# Altium PCB pcb_full_revD.PcbDoc (part 1 of 2)
Units mm, origin at the board's own origin, x right, y up, seen from the top; angles counter-clockwise.
Board outline 49.62 x 32.2 mm, 2 copper layers (Top Layer, Bottom Layer); 45 components, 51 nets, 180 pads, 111 vias.
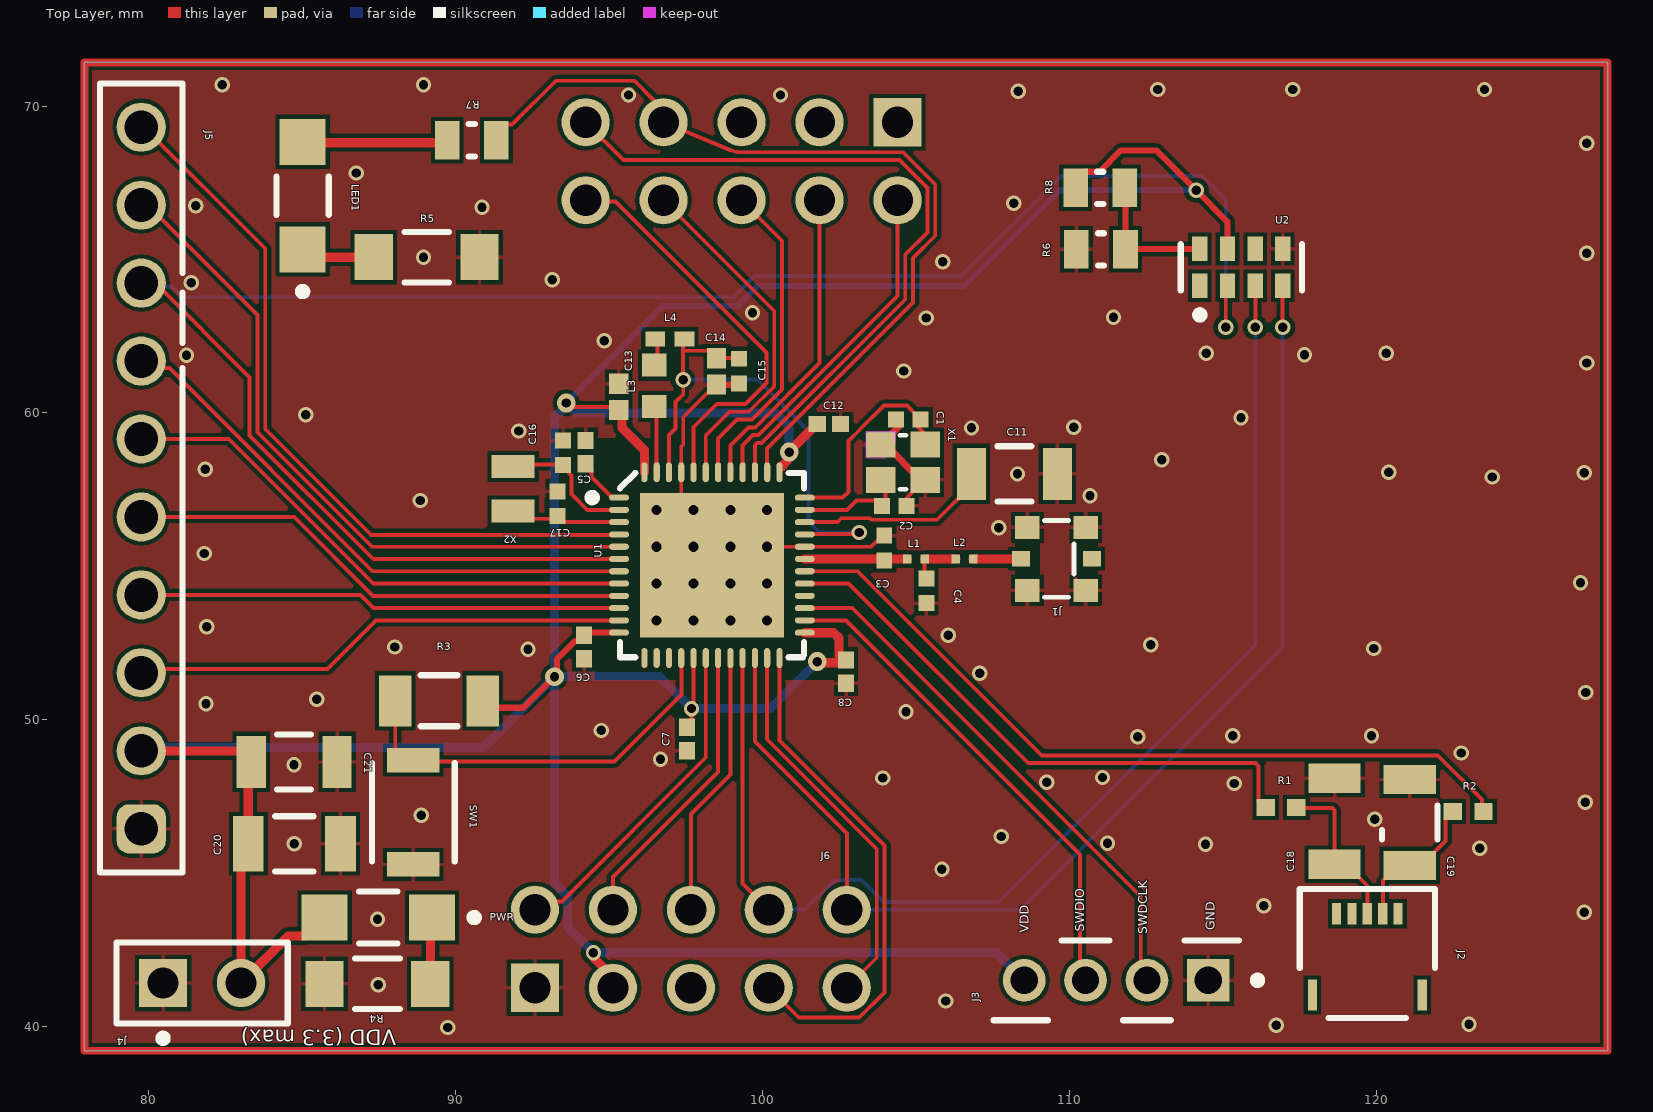
[diagram p0: Top Layer view]
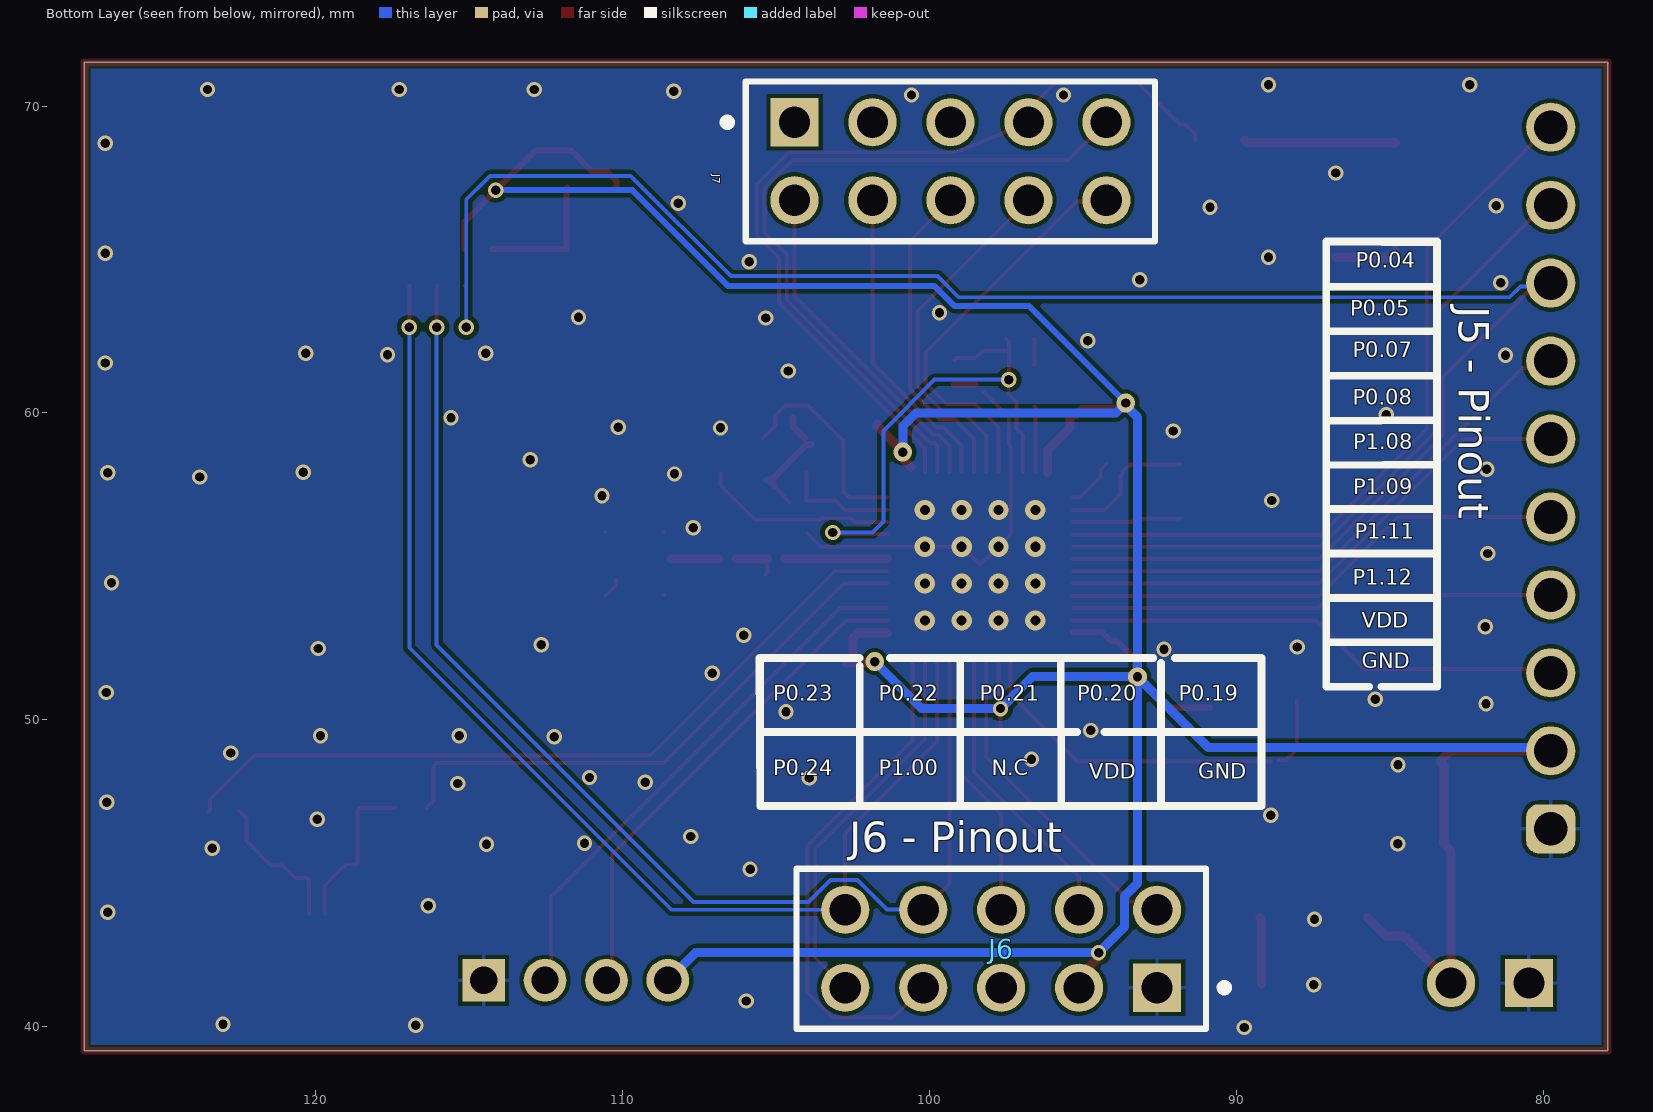
[diagram p1: Bottom Layer view, seen from below]
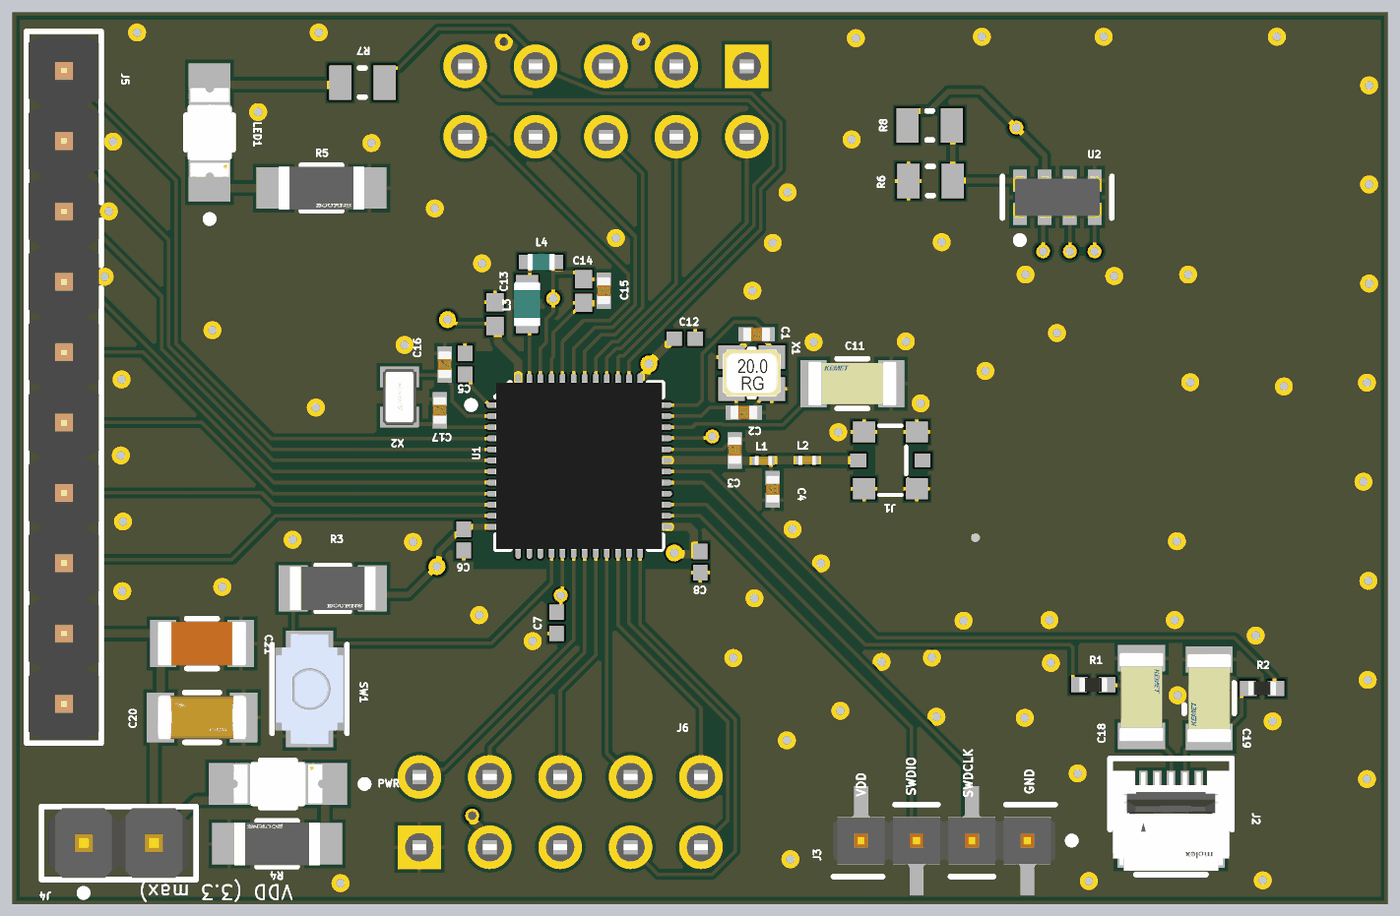
[diagram p2: 3D render of the assembled board from above, using the file's embedded part models]

## Layer stack, top to bottom
Top Solder: solder mask 0.0102, Solder Resist, Dk 3.5
Top Layer: signal copper 0.0356
Dielectric 1: dielectric 0.32, FR-4, Dk 4.8
Bottom Layer: signal copper 0.0356
Bottom Solder: solder mask 0.0102, Solder Resist, Dk 3.5

## Board outline
77.906,39.221 77.906,71.42 127.528,71.42 127.528,39.221

## Design rules (kind name [scope] priority, off if disabled: settings)
BoardOutlineClearance [All] p1: gap=0.2 ignorepadtopadclearanceinfootprint=FALSE
Clearance [All] p1: gap=0.127 ignorepadtopadclearanceinfootprint=FALSE except(0.25: Arc-Hole Track-Hole SMDPad-Hole THPad-Hole Via-Hole Fill-Hole Poly-Hole Region-Hole Text-Hole)
ComponentClearance [All] p1: gap=0.127 collisioncheckmode=3 verticalgap=0.127 showdistances=TRUE
DiffPairsRouting [All] p1: maxlimit=0.254 minlimit=0.127 mostfreqgap=0.127 toplayer_minwidth=0.127 toplayer_maxwidth=25.4 toplayer_prefwidth=0.127 bottomlayer_minwidth=0.127 bottomlayer_maxwidth=25.4 bottomlayer_prefwidth=0.127 maxuncoupledlength=12.7
Height [All] p1: minheight=0 maxheight=1816.048 prefheight=12.7
HoleSize [All] p1: absolutevalues=TRUE maxlimit=6.3 minlimit=0.3 maxpercent=80.000 minpercent=20.000
HoleToHoleClearance [All] p1: gap=0.25 allowstackedmicrovias=FALSE
MinimumAnnularRing [All] p1: minimumring=0.076
MinimumSolderMaskSliver [All] p1: minsoldermaskwidth=0.05
PlaneClearance [All] p1: clearance=0.127
PlaneConnect PlaneConnectPowerPads [InPadClass('PowerPads')] p1: planeconnectstyle=Direct reliefexpansion=0.508 reliefentries=4 reliefconductorwidth=0.254 reliefairgap=0.254
PlaneConnect [All] p2: pad.planeconnectstyle=Relief pad.reliefexpansion=0.3 pad.reliefentries=4 pad.reliefconductorwidth=0.127 pad.reliefairgap=0.127 via.planeconnectstyle=Direct via.reliefexpansion=0.3 via.reliefentries=4 via.reliefconductorwidth=0.127 via.reliefairgap=0.127
PolygonConnect PolygonConnectPowerPads [All vs (InPadClass('PowerPads'))] p1: connectstyle=Direct reliefconductorwidth=0.254 reliefentries=4 polygonreliefangle="90 Angle" airgapwidth=0.254
PolygonConnect [All] p2: thpad.connectstyle=Relief thpad.reliefconductorwidth=0.127 thpad.reliefentries=4 thpad.polygonreliefangle="90 Angle" thpad.airgapwidth=0.127 smdpad.connectstyle=Relief smdpad.reliefconductorwidth=0.127 smdpad.reliefentries=4 smdpad.polygonreliefangle="90 Angle" smdpad.airgapwidth=0.127 via.connectstyle=Direct via.reliefconductorwidth=0.127 via.reliefentries=4 via.polygonreliefangle="90 Angle" via.airgapwidth=0.127
RoutingVias [All] p1: holewidth=0.3 width=0.6 viastyle="Through Hole" minholewidth=0.3 minwidth=0.5 maxholewidth=0.6 maxwidth=6.6
SilkToSilkClearance [All] p1: silktosilkclearance=0
SilkToSolderMaskClearance [IsPad] p1: minsilkscreentomaskgap=0 clearancetoexposedcopper=TRUE
SolderMaskExpansion [All] p1: expansion=0.075 istentingtop=FALSE
Width [All] p1: maxlimit=25.4 minlimit=0.127 preferedwidth=0.127 minimp=50.000000 maximp=50.000000 favimp=50.000000
20 further rules are at their usual default settings.

## Components (designator, comment, footprint, x,y, rotation, side; value= is the part's Value field where it differs from the comment)
C1 "12pF" FP-C0402-BB-MFG 104.75,59.792 r180 top value="12 pF"
C2 "12pF" FP-C0402-BB-MFG 104.292,56.972 r180 top value="12 pF"
C3 "1pF" FP-C0402-BB-MFG 103.962,55.601 r90 top value="1.0 pF"
C4 "1.2pF" FP-C0402-BB-MFG 105.334,54.204 r270 top value="1.2 pF"
C5 "100nF" CAPC1005X55X30LL05T10 94.234,58.725 r270 top
C6 "100nF" CAPC1005X55X30LL05T10 94.183,52.375 r90 top
C7 "100nF" CAPC1005X55X30LL05T10 97.536,49.378 r90 top
C8 "100nF" CAPC1005X55X30LL05T10 102.72,51.575 r90 top
C11 "100pF" FP-C1206C-EB-MFG 108.204,58.014 r0 top value="100 pF"
C12 "100nF" CAPC1005X55X30LL05T10 102.159,59.639 r180 top
C13 "1uF" CAPC1005X60X30NL05T10 95.313,60.525 r270 top
C14 "1uF" CAPC1005X60X30NL05T10 98.505,61.355 r90 top
C15 "47nF" FP-C0402-BB-MFG 99.238,61.366 r270 top value="47,000 pF"
C16 "12pF" FP-C0402-BB-MFG 93.497,58.699 r90 top value="12 pF"
C17 "12pF" FP-C0402-BB-MFG 93.32,57.048 r90 top value="12 pF"
C18 "300pF" FP-C1206C-EB-MFG 118.634,46.698 r270 top value="300 pF"
C19 "300pF" FP-C1206C-EB-MFG 121.082,46.66 r90 top value="300 pF"
C20 "CC1206KRX7R9BB104" FP-CC1206-1_25-MFG 84.745,45.962 r0 top value="100 nF"
C21 "C1206C106K4RACAUTO" FP-C1206C-EH-MFG 84.739,48.629 r0 top value=10uF
J1 "MM8130-2600" COAXIAL-SWF 109.576,55.245 r90 top
J2 "503480-0540" FP-503480-0540-MFG 119.701,42.388 r0 top
J3 "TMM-104-01-S-S" FP-TMM-104-01-S-S-MFG 111.521,41.516 r180 top
J4 "M20-9990245" FP-M20-9990245-MFG 81.737,41.427 r0 top
J5 "61301011121" 61301011121 79.756,57.881 r90 top
J6 "Comment" FP-10-89-7101-MFG 97.663,42.545 r0 bottom
J7 "Comment" FP-10-89-7101-MFG 99.314,68.199 r180 bottom
L1 "4.7nH" INDC0603X03L_C 104.994,55.238 r0 top
L2 "2.2nH" INDC0603X03L_C 106.578,55.245 r0 top
L3 "10µH" INDC1608X06L 96.469,60.884 r270 top
L4 "15nH" INDC1005X04L 96.977,62.408 r180 top
LED1 "HSMS-C150" FP-HSMS-C150-MFG 85.014,67.081 r90 top
PWR "HSMS-C150" FP-HSMS-C150-MFG 87.48,43.561 r180 top
R1 "0R" RESC1005X04L 116.892,47.142 r180 top
R2 "0R" RESC1005X04L 122.987,47.015 r0 top
R3 "10k" FP-CR1206-IPC_B 89.459,50.622 r0 top
R4 "CR1206-JW-221ELF" FP-CR1206-MFG 87.452,41.402 r180 top
R5 "CR1206-JW-221ELF" FP-CR1206-MFG 89.052,65.075 r0 top
R6 "0R" RESC2013X60X35LL10T20 110.998,67.335 r180 top
R7 "0R" RESC2013X60X35LL10T20 90.526,68.885 r180 top
R8 "0R" RESC2013X60X35LL10T20 111.023,65.329 r0 top
SW1 "" FP-B3U-1000P-MFG 88.621,46.99 r90 top
U1 "nRF52840-QFAA" QFN40P600X600X90-48N 98.349,55.042 r0 top
U2 "RV-3028-C7 32.768kHz 1ppm TA QC" FP-RV-3028-C7_32_768kHz_1-MFG 115.595,64.745 r0 top
X1 "32MHz" XTAL_2016_NT 104.572,58.395 r0 top
X2 "32.768KHZ" FP-ABS06-MFG 91.872,57.531 r90 top

## Footprints (in the part's own frame and the unit in brackets; to place one, negate y for a bottom-side part, rotate by r counter-clockwise, add the part's x,y. Pads: shape width x height; smd on the part's side, far side on the other; paste and mask are expansions set on the pad)
61301011121 [mm] "Pin Header, pitch 2.54 mm, THT, Vertical, single row, 10p"
  rrect50% 1.6x1.6 hole 1.1: 1(-11.43,0)
  round 1.6 hole 1.1: 2(-8.89,0) 3(-6.35,0) 4(-3.81,0) 5(-1.27,0) 6(1.27,0) 7(3.81,0) 8(6.35,0) 9(8.89,0) 10(11.43,0)
  silkscreen extent -12.85,-1.35 12.85,1.35, body extent -12.7,-1.27 12.7,1.27, height 8.57
CAPC1005X55X30LL05T10 [mm] "Chip Capacitor, 2-Leads, Body 1.00x0.50mm, IPC High Density"
  rect 0.56x0.52 smd: 1(-0.38,0) 2(0.38,0)
  body extent -0.53,-0.28 0.53,0.28, height 0.55
CAPC1005X60X30NL05T10 [mm] "Chip Capacitor, 2-Leads, Body 1.00x0.50mm, IPC Medium Density"
  rect 0.66x0.62 smd: 1(-0.43,0) 2(0.43,0)
  body extent -0.53,-0.28 0.53,0.27, height 0.6
COAXIAL-SWF [mm]
  rect 0.5x0.58 smd: 1(0,1.16) 3(0,-1.16)
  rect 0.75x0.8 smd: 2(-1.025,-0.95) 2(-1.025,0.95) 2(1.025,-0.95) 2(1.025,0.95)
  Top Layer pour cut-out: -0.65,0.55 0.65,0.55 0.65,1.35 -0.65,1.35
  Top Layer pour cut-out: 0.65,-0.55 -0.65,-0.55 -0.65,-1.35 0.65,-1.35
  silkscreen extent -1.25,-0.57 1.25,0.4, body extent -1.26,-1.3 1.26,1.3, height 1.55
FP-10-89-7101-MFG [mm]
  rect 1.57x1.57 hole 1.02 paste-2539.97 mask+0: 1(-5.08,1.27)
  round 1.57 hole 1.02 paste-2539.97 mask+0: 2(-5.08,-1.27) 3(-2.54,1.27) 4(-2.54,-1.27) 5(0,1.27) 6(0,-1.27) 7(2.54,1.27) 8(2.54,-1.27) 9(5.08,1.27) 10(5.08,-1.27)
  silkscreen extent -7.39,-2.61 6.67,2.61, body extent -6.35,-2.54 6.35,2.54, height 8.89
FP-503480-0540-MFG [mm]
  rect 0.3x0.7 smd paste+0 mask+0: 1(-1,1.3) 2(-0.5,1.3) 3(0,1.3) 4(0.5,1.3) 5(1,1.3)
  rect 0.3x1 smd paste+0 mask+0: 6(-1.79,-1.35) 7(1.79,-1.35)
  silkscreen extent -2.2,-2.1 2.2,2.1, body extent -2.3,-2.2 2.3,2.2, height 0.25
FP-ABS06-MFG [mm]
  rect 0.75x1.4 smd paste+0 mask+0: 1(-0.725,0) 2(0.725,0)
  body extent -1.2,-0.8 1.2,0.8, height 0.25
FP-B3U-1000P-MFG [mm]
  rect 0.8x1.7 smd paste+0 mask+0: 1(-1.7,0) 2(1.7,0)
  silkscreen extent -1.6,-1.35 1.6,1.35, body extent -2.2,-1.45 2.2,1.45, height 0.25
FP-C0402-BB-MFG [mm]
  rect 0.52x0.52 smd paste+0 mask+0: 1(-0.4,0) 2(0.4,0)
  body extent -0.8,-0.4 0.8,0.4, height 0.25
FP-C1206C-EB-MFG [mm]
  rect 0.95x1.7 smd paste+0 mask+0: 1(-1.4,0) 2(1.4,0)
  silkscreen extent -0.55,-0.9 0.55,0.9, body extent -2,-1 2,1, height 0.25
FP-C1206C-EH-MFG [mm]
  rect 0.95x1.7 smd paste+0 mask+0: 1(-1.4,0) 2(1.4,0)
  silkscreen extent -0.55,-0.9 0.55,0.9, body extent -2,-1 2,1, height 0.25
FP-CC1206-1_25-MFG [mm]
  rect 1x1.8 smd paste+0 mask+0: 1(-1.5,0) 2(1.5,0)
  silkscreen extent -0.63,-0.9 0.63,0.9, body extent -2.2,-1.25 2.2,1.25, height 0.25
FP-CR1206-IPC_B [mm]
  rect 1.058x1.662 smd paste+0 mask+0: 1(-1.427,0) 2(1.427,0)
  silkscreen extent -0.6,-0.83 0.6,0.83, body extent -2.21,-1.08 2.21,1.08, height 0.25
FP-CR1206-MFG [mm]
  rect 1.25x1.5 smd paste+0 mask+0: 1(-1.725,0) 2(1.725,0)
  silkscreen extent -0.72,-0.82 0.72,0.82, body extent -2.45,-0.92 2.45,0.92, height 0.25
FP-HSMS-C150-MFG [mm]
  rect 1.5x1.5 smd paste+0 mask+0: 1(-1.75,0) 2(1.75,0)
  silkscreen extent -3.25,-0.85 0.63,0.85, body extent -2.6,-0.95 2.6,0.95, height 0.25
FP-M20-9990245-MFG [mm]
  rect 1.57x1.57 hole 1.02 paste-2539.97 mask+0: 1(-1.27,0)
  round 1.57 hole 1.02 paste-2539.97 mask+0: 2(1.27,0)
  silkscreen extent -2.79,-1.92 2.79,1.32, body extent -2.89,-1.42 2.89,1.42, height 0.25
FP-RV-3028-C7_32_768kHz_1-MFG [mm]
  rect 0.5x0.8 smd paste+0 mask+0: 1(-1.35,-0.6) 2(-0.45,-0.6) 3(0.45,-0.6) 4(1.35,-0.6) 5(1.35,0.6) 6(0.45,0.6) 7(-0.45,0.6) 8(-1.35,0.6)
  silkscreen extent -1.97,-1.67 1.97,0.75, body extent -1.7,-1.1 1.7,1.1, height 0.25
FP-TMM-104-01-S-S-MFG [mm]
  rect 1.39x1.39 hole 0.89 paste-2539.97 mask+0: 1(-3,0)
  round 1.39 hole 0.89 paste-2539.97 mask+0: 2(-1,0) 3(1,0) 4(3,0)
  silkscreen extent -4.73,-1.3 4,1.3, body extent -4.1,-2.07 4.1,2.07, height 0.25
INDC0603X03L_C [mm]
  rect 0.27x0.3 smd: 1(-0.285,0) 2(0.285,0)
  body extent -0.31,-0.16 0.31,0.16, height 0.26
INDC1005X04L [mm]
  rect 0.65x0.5 smd: 1(-0.475,0) 2(0.475,0)
  body extent -0.5,-0.3 0.5,0.3, height 0.5
INDC1608X06L [mm]
  rect 0.75x0.8 smd: 1(-0.675,0) 2(0.675,0)
  body extent -0.8,-0.48 0.8,0.48, height 0.8
QFN40P600X600X90-48N [mm]
  oval 0.65x0.2 smd: 1(-3.025,2.2) 2(-3.025,1.8) 3(-3.025,1.4) 4(-3.025,1) 5(-3.025,0.6) 6(-3.025,0.2) 7(-3.025,-0.2) 8(-3.025,-0.6) 9(-3.025,-1) 10(-3.025,-1.4) 11(-3.025,-1.8) 12(-3.025,-2.2) 25(3.025,-2.2) 26(3.025,-1.8) 27(3.025,-1.4) 28(3.025,-1) 29(3.025,-0.6) 30(3.025,-0.2) 31(3.025,0.2) 32(3.025,0.6) 33(3.025,1) 34(3.025,1.4) 35(3.025,1.8) 36(3.025,2.2)
  oval 0.2x0.65 smd: 13(-2.2,-3.025) 14(-1.8,-3.025) 15(-1.4,-3.025) 16(-1,-3.025) 17(-0.6,-3.025) 18(-0.2,-3.025) 19(0.2,-3.025) 20(0.6,-3.025) 21(1,-3.025) 22(1.4,-3.025) 23(1.8,-3.025) 24(2.2,-3.025) 37(2.2,3.025) 38(1.8,3.025) 39(1.4,3.025) 40(1,3.025) 41(0.6,3.025) 42(0.2,3.025) 43(-0.2,3.025) 44(-0.6,3.025) 45(-1,3.025) 46(-1.4,3.025) 47(-1.8,3.025) 48(-2.2,3.025)
  rect 4.7x4.7 smd: 49(0,0)
  silkscreen extent -4.02,-3 3,3, body extent -3.02,-3.02 3.02,3.02, height 0.86
RESC1005X04L [mm]
  rect 0.6x0.55 smd: 1(-0.5,0) 2(0.5,0)
  body extent -0.5,-0.25 0.5,0.25, height 0.3
RESC2013X60X35LL10T20 [mm] "Chip Resistor, 2-Leads, Body 2.00x1.25mm, IPC High Density"
  rect 0.8x1.25 smd: 1(-0.8,0) 2(0.8,0)
  silkscreen extent -0.1,-0.53 0.1,0.53, body extent -1.05,-0.67 1.05,0.67, height 0.6
XTAL_2016_NT [mm]
  rect 0.95x0.85 smd: 1(-0.725,-0.575) 2(-0.725,0.575) 2(0.725,-0.575) 3(0.725,0.575)
  Top Layer lines w0.225: -0.725,0.575 -0.675,0.575 -0.575,0.575 0.575,-0.575 0.629,-0.575 0.675,-0.575 0.725,-0.575
  Top Layer keep-out lines w0.01: -0.55,0.15 -1.2,0.15 -1.2,1 -0.25,1 -0.25,0.65
  silkscreen extent -0.1,-0.88 0.1,0.88, body extent -1.05,-0.85 1.05,0.85, height 0.56

## Part data
C1 C2 C16 C17: library part CMP-1034-00766-3, "CAP CER 12PF 50V NP0 0402", Capacitance="12 pF", Manufacturer=Kemet, Manufacturer Part Number=C0402C120D5GACTU, Package=C0402-BB, Temperature="-55°C to +125°C", Temperature Characteristic=C0G, Temperature Coefficient=15%, Temperature Range High=+125°C, Temperature Range Low=-55°C, Tolerance="0.5 pF", Voltage Rating="50 V", Automotive=No, Category=Cap, ComponentLink2Description=Datasheet, ComponentLink2URL=https://content.kemet.com/datasheets/KEM_C1002_X7R_SMD.pdf, Device Class L1="Passive Components", Device Class L2=Capacitors, Device Class L3="Ceramic Capacitors", Digikey Description="CAP CER 12PF 50V NP0 0402", Height=0.55mm, Ipc Land Pattern Name=CAPC10050X50, Lead Free=Yes, Material=Ceramic, Mouser Description="Multilayer Ceramic Capacitors MLCC - SMD/SMT 50volts 12pF C0G Tol=0.5pF", Octopart=https://octopart.com/c0402c120d5gactu-kemet-15963451, RoHS=TRUE
C3: library part CMP-2008-03470-3, "CAP CER 1PF 50V NP0 0402", Capacitance="1.0 pF", Manufacturer=Kemet, Manufacturer Part Number=C0402C109C5GACTU, Package=C0402-BB, Temperature="-55°C to +125°C", Temperature Characteristic=C0G, Temperature Coefficient=15%, Temperature Range High=+125°C, Temperature Range Low=-55°C, Tolerance="0.25 pF", Voltage Rating="50 V", Automotive=No, Category=Cap, ComponentLink2Description=Datasheet, ComponentLink2URL=https://content.kemet.com/datasheets/KEM_C1002_X7R_SMD.pdf, Device Class L1="Passive Components", Device Class L2=Capacitors, Device Class L3="Ceramic Capacitors", Digikey Description="CAP CER 1PF 50V NP0 0402", Height=0.55mm, Ipc Land Pattern Name=CAPC10050X50, Lead Free=Yes, Material=Ceramic, Mouser Description="Multilayer Ceramic Capacitors MLCC - SMD/SMT 50volts 1.0pF C0G .25pF", Octopart=https://octopart.com/c0402c109c5gactu-kemet-9138550, RoHS=TRUE
C4: library part CMP-2008-03099-3, "CAP CER 1.2PF 50V C0G/NP0 0402", Capacitance="1.2 pF", Manufacturer=Kemet, Manufacturer Part Number=C0402C129C5GACTU, Package=C0402-BB, Temperature="-55°C to +125°C", Temperature Characteristic=C0G, Temperature Coefficient=15%, Temperature Range High=+125°C, Temperature Range Low=-55°C, Tolerance="0.25 pF", Voltage Rating="50 V", Automotive=No, Category=Cap, ComponentLink2Description=Datasheet, ComponentLink2URL=https://content.kemet.com/datasheets/KEM_C1002_X7R_SMD.pdf, Device Class L1="Passive Components", Device Class L2=Capacitors, Device Class L3="Ceramic Capacitors", Digikey Description="CAP CER 1.2PF 50V C0G/NP0 0402", Height=0.55mm, Ipc Land Pattern Name=CAPC10050X50, Lead Free=Yes, Material=Ceramic, Mouser Description="Cap Ceramic 1.2pF 50V C0G 0.25pF SMD 0402 125°C Paper T/R", Octopart=https://octopart.com/c0402c129c5gactu-kemet-193076, RoHS=TRUE
C5 C6 C7 C8 C12: library part CMP-0001-00074-2, Manufacturer=Kemet, Part Number=C0402C104K4RACTU
C11: library part CMP-03020-032313-1, "CAP CER 100PF 50V 10% NP0 1206", Capacitance="100 pF", Manufacturer=KEMET, Manufacturer Part Number=C1206C101K5GACTU, Package=C1206C-EB, Temperature="-55°C to +150°C", Temperature Characteristic=C0G, Temperature Coefficient=15%, Temperature Range High=+150°C, Temperature Range Low=-55°C, Tolerance=0.1, Voltage Rating="50 V", Automotive=Yes, Automotive Grade="Grade 0", Category=Cap, ComponentLink2Description=Datasheet, ComponentLink2URL=https://content.kemet.com/datasheets/KEM_C1007_X8R_ULTRA_150C_SMD.pdf, Device Class L1="Passive Components", Device Class L2=Capacitors, Device Class L3="Ceramic Capacitors", Digikey Description="CAP CER 100PF 50V 10% NP0 1206", Height=0.88mm, Ipc Land Pattern Name=CAPC320160X78, Lead Free=Yes, Material=Ceramic, Mouser Description="Multilayer Ceramic Capacitors MLCC - SMD/SMT 50volts 100pF C0G 10%", Octopart=https://octopart.com/c1206c101k5gactu-kemet-9138650, RoHS=TRUE
C13 C14: library part CMP-2008-02056-1, Manufacturer=Kemet, Part Number=C0402C105M8PACTU
C15: library part CMP-2008-03220-2, "CAP CER 0.047UF 25V 10% X7R 0402", Capacitance="47,000 pF", Manufacturer=Kemet, Manufacturer Part Number=C0402C473K3RACTU, Package=C0402-BB, Temperature="-55°C to +125°C", Temperature Characteristic=X7R, Temperature Coefficient=15%, Temperature Range High=+125°C, Temperature Range Low=-55°C, Tolerance=0.1, Voltage Rating="25 V", Automotive=No, Category=Cap, ComponentLink2Description=Datasheet, ComponentLink2URL=https://content.kemet.com/datasheets/KEM_C1002_X7R_SMD.pdf, Device Class L1="Passive Components", Device Class L2=Capacitors, Device Class L3="Ceramic Capacitors", Digikey Description="CAP CER 0.047UF 25V 10% X7R 0402", Height=0.55mm, Ipc Land Pattern Name=CAPC10050X50, Lead Free=Yes, Material=Ceramic, Mouser Description="Multilayer Ceramic Capacitors MLCC - SMD/SMT 25volts 47000pF X7R 10%", Octopart=https://octopart.com/c0402c473k3ractu-kemet-108381, RoHS=TRUE
C18 C19: library part CMP-1037-01976-2, "CAP CER 300PF 50V 5% NP0 1206", Capacitance="300 pF", Manufacturer=KEMET, Manufacturer Part Number=C1206C301J5GACTU, Package=C1206C-EB, Temperature="-55°C to +150°C", Temperature Characteristic=C0G, Temperature Coefficient=15%, Temperature Range High=+150°C, Temperature Range Low=-55°C, Tolerance=0.05, Voltage Rating="50 V", Automotive=Yes, Automotive Grade="Grade 0", Category=Cap, ComponentLink2Description=Datasheet, ComponentLink2URL=https://content.kemet.com/datasheets/KEM_C1007_X8R_ULTRA_150C_SMD.pdf, Device Class L1="Passive Components", Device Class L2=Capacitors, Device Class L3="Ceramic Capacitors", Digikey Description="CAP CER 300PF 50V 5% NP0 1206", Height=0.88mm, Ipc Land Pattern Name=CAPC320160X78, Lead Free=Yes, Material=Ceramic, Mouser Description="Cap Ceramic 300pF 50V C0G 5% SMD 1206 125°C Plastic T/R", Octopart=https://octopart.com/c1206c301j5gactu-kemet-12563790, RoHS=TRUE
C20: library part CMP-03422-000842-1, "CAP CER 0.1UF 50V X7R 1206", Capacitance="100 nF", Manufacturer=Yageo, Package=CC1206-1.25, Temperature="-55°C to +125°C", Temperature Characteristic=X7R, Temperature Coefficient=15%, Temperature Range High=+125°C, Temperature Range Low=-55°C, Tolerance=0.1, Voltage Rating="50 V", Automotive=No, Automotive Grade=NA, Category=Cap, ComponentLink2Description=Datasheet, ComponentLink2URL=http://www.yageo.com/documents/recent/UPY-NP0X7R_HV_1KV-to-3KV_11.pdf, Device Class L1="Passive Components", Device Class L2=Capacitors, Device Class L3="Ceramic Capacitors", Digikey Description="CAP CER 0.1UF 50V X7R 1206", Footprint Url=http://www.yageo.com/exep/pages/download/literatures/UPY-C_GEN_24.pdf, Height=1.45mm, Lead Free=Yes, Manufacturer Part Number=CC1206KRX7R9BB104, Material=Ceramic, Mouser Description="Multilayer Ceramic Capacitors MLCC - SMD/SMT 100nF 50V X7R 10%", Octopart=https://octopart.com/cc1206krx7r9bb104-yageo-39467816, RoHS=TRUE
C21: library part CMP-03020-003375-1, "CAP CER 10UF 16V X7R 1206", Capacitance=10uF, Manufacturer=Kemet, Package=C1206C-EH, Temperature="-55°C to +125°C", Temperature Characteristic=X7R, Temperature Coefficient=15%, Temperature Range High=+125°C, Temperature Range Low=-55°C, Tolerance=10%, Voltage Rating=16V, Automotive=Yes, Automotive Grade="Grade 1", Category=Cap, ComponentLink2Description=Datasheet, ComponentLink2URL=https://content.kemet.com/datasheets/KEM_C1023_X7R_AUTO_SMD.pdf, Device Class L1="Passive Components", Device Class L2=Capacitors, Device Class L3="Ceramic Capacitors", Digikey Description="CAP CER 10UF 16V X7R 1206", Height=1.8mm, Ipc Land Pattern Name=CAPC320160X160, Lead Free=Yes, Manufacturer Part Number=C1206C106K4RACAUTO, Material=Ceramic, Mouser Description="Multilayer Ceramic Capacitors MLCC - SMD/SMT 10uF 16V 10% AUTO", Octopart=https://octopart.com/c1206c106k4racauto-kemet-20072893, RoHS=TRUE
J1: "Coaxial Connector with Switch", Manufacturer=Murata, Part number IPS=00000009955, Part number Norautron=N.A., Supplier Part Number 1=490-4981-1-ND, Artikkelnr Noca=55029011, Author=rsk, Component Class=Connectors, ComponentLink1Description=Datasheet, ComponentLink1URL=N.A., ComponentLink2Description="Supplier link", ComponentLink2URL=N.A., Footprint Doc=COAXIAL-SWF, HelpURL=http://www.murata.com/products/catalog/pdf/o33e.pdf, LatestRevisionDate=2014-04-24, Manufacturer Part Number=MM8130-2600, Note=N.A., Pad Count=3, Part Number=MM8130-2600, PartId=100500400, Pin Count=3, Published=2014-04-24, Publisher="Nordic Semiconductor", Supplier 1=Digi-Key, Supplier 2=Mouser, Supplier Part Number 2=81-MM8130-2600RA2
J2: library part CMP-00257-52963780-1, "503480-0540 Connector FFC/FPC SKT 5 Position 0.5mm Solder Right Angle Surface Mount T/R", Current Rating=500mA, Flammability Rating="UL94 V-0", Manufacturer Lifecycle Status=ACTIVE, Max Operating Temperature=85°C, Min Operating Temperature=-40°C, Voltage Rating=50V, Actuator Material="Glass, Nylon, Polyamide", Contact Material="Bronze, Gold, Nickel", Contact Plating=Gold, Country of Origin=KR, Halogen Free="Low Halogen", Height=2.07mm, Housing Material=Polymer, Lifecycle Status=Production, Mount="Surface Mount", NexarPartId=52963780, Number of Circuits=5, Number of Contacts=5, Number of Positions=5, Number of Rows=1, Orientation="Right Angle", Pitch=508µm, Plating=Gold, RoHS=Compliant, Termination=Solder, Wire/Cable Type=Straight
J3: library part CMP-02766-001674-1, "CONN HEADER VERT 4POS 2MM", Color=Black, Max Current Rating=3.9A, Max Operating Temperature=125°C, Max Voltage Rating (AC)=500V, Min Operating Temperature=-55°C, Package Quantity=1, Connector Type="Male Pin", Contact Material=Bronze, Contact Mating Length=0.126inch, Contact Plating=Gold, Contact Type="Male Pin", Depth=1.97mm, Gender=Male, Housing Color=Black, Housing Material=Polymer, Lead Free="Lead Free", Length=8mm, Mount="Through Hole", Number of Contacts=4, Number of Positions=4, Number of Rows=1, Orientation=Straight, Packaging=Bulk, Pitch=2mm, Radiation Hardening=No, RoHS Compliant=Yes, Series="FleXYZ™ TMM", Termination=Solder, Width=1.97mm
J4: library part CMP-15831-000105-1, "CONN HEADER VERT 2POS 2.54MM", Case/Package=SIL, Color=Black, Contact Resistance=25mR, Current=3A, Flammability Rating="UL94 V-0", Insulation Resistance=10GR, Max Operating Temperature=105°C, Min Operating Temperature=-40°C, Package Quantity=1000, Voltage=50V, Voltage Rating (AC)=750V, Connector Type="Male Pin", Contact Finish - Mating=GOLD, Contact Material=Brass, Contact Mating Length=0.24inch, Contact Plating=Gold, Contact Shape=Square, Contact Type="Male Pin", Current Rating=3A, Depth=2.54mm, Fastening Type=Pull, Gender=Male, Height=0.12inch, Housing Color=Black, Housing Material=Nylon, Insulation Color=Black, Insulation Material=Nylon, Lead Pitch=2.54mm, Length=5.08mm, Mated Stacking Heights=16.54mm, Mating Cycles=300, Max Current Rating=3A, Mount="Through Hole", Number of Contacts=2, Number of Poles=2, Number of Positions=2, Number of Rows=1, Orientation=Straight, Packaging=Bulk, Pitch=2.54mm, Radiation Hardening=No, Reach SVHC Compliant=Yes, Series=M20, Termination=Solder, Weight=0.25lb, Width=0.25inch, Working Voltage=750V
J5: library part CMP-1502-01082-4, Color=Black, Contact Resistance=20mΩ, Current Rating=3A, Flammability Rating="UL94 V-0", Insulation Resistance=1GΩ, Max Operating Temperature=105°C, Min Operating Temperature=-40°C, Operating Supply Voltage=250V, Connector Type="Male Pin", Contact Gender=Male, Contact Material=Copper, Contact Mating Length=5.9944mm, Contact Plating=Gold, Gender=Male, Height=8.74mm, Housing Material=PBT, Lead Pitch=2.54mm, Length=2.54mm, Mount="Through Hole", NexarPartId=18818159, Number of Contacts=10, Number of Pins=10, Number of Positions=10, Number of Rows=1, Orientation=Vertical, Packaging=Bulk, Pitch=2.54mm, REACH SVHC=Unknown, RoHS=Compliant, Termination=Solder, Voltage Rating=250V, Width=25.4mm
J6 J7: library part CMP-04776-000908-1, "CONN HEADER VERT 10POS 2.54MM", Color=Black, Contact Resistance=15mR, Current Rating=3A, Max Current Rating=1A, Max Operating Temperature=105°C, Min Operating Temperature=-40°C, Package Quantity=1, Voltage Rating=250V, Connector Type="Male Pin", Contact Gender=Male, Contact Material=Brass, Contact Mating Length=0.24inch, Contact Plating=Tin, Contact Type="Male Pin", Depth=5.08mm, Gender=Male, Height=15.97mm, Housing Color=Black, Housing Material=Thermoplastic, Length=12.7mm, Mount="Through Hole", Number of Contacts=10, Number of Positions=10, Number of Rows=2, Orientation=Straight, Packaging=Bulk, Pitch=2.54mm, RoHS Compliant=Yes, Row Spacing=0.1inch, Series="C-Grid® 70280", Termination=Solder
L1: library part L0201-4n7, "High frequency chip inductor ±5%", Component Class=Inductors, Footprint Doc=0201, LatestRevisionDate=2013-04-10, Pad Count=2, Part Number=L0201-4n7, Published=2013-04-10
L2: library part L0201-2n2, "High frequency chip inductor ±5%", Component Class=Inductors, Footprint Doc=0201, LatestRevisionDate=2013-04-10, Pad Count=2, Part Number=L0201-2n2, Published=2013-04-10
L3: library part L0603-10µ-TDK, "Chip inductor, IDC,min = 50 mA, ±20%", Component Class=Inductors, Footprint Doc=0603, LatestRevisionDate=2012-09-19, Pad Count=2, Part Number=L0603-10µ-TDK, Published=2019-05-06
L4: library part L0402-15n, "High frequency chip inductor ±10%", Component Class=Inductors, Footprint Doc=0402, LatestRevisionDate=2012-09-19, Pad Count=2, Part Number=L0402-15n, Published=2010-07-12
LED1 PWR: library part CMP-21615-000001-1, "LED RED DIFFUSED CHIP SMD", Case Code (Imperial)=1206, Case Code (Metric)=3216, Color=Red, Forward Current=20mA, Forward Voltage=2.1V, Lens Color=White, Max Operating Temperature=85°C, Min Operating Temperature=-40°C, Package Quantity=1, Power Dissipation=65mW, Reverse Voltage=5V, Case/Package=1206, Depth=1.6mm, Dominant Wavelength=626nm, Height=1.1mm, Illumination Color=Red, Lead Free="Lead Free", Length=3.2mm, Lens Style=Rectangular, Lens Transparency=Diffused, Luminous Intensity=10mcd, Mount="Surface Mount", Number of Elements=1, Number of LEDs=1, Number of Pins=2, Packaging="Tape and Reel", Power Rating=65mW, Radiation Hardening=No, REACH SVHC="No SVHC", Test Current=20mA, Viewing Angle=170°, Wavelength=626nm, Width=1.6mm
R1 R2: library part R0402-0R, "Resistor, ±5%, 0.063W", Manufacturer=N.A., Part number IPS=00000007128, Supplier Part Number 1=146-9661, Artikkelnr Noca=27049000, Author=rsk, Component Class=Resistors, ComponentLink1Description=Datasheet, ComponentLink1URL=N.A., ComponentLink2Description="Supplier link", ComponentLink2URL=N.A., Footprint Doc=0402, HelpURL=N.A., LatestRevisionDate=2009-11-23, Manufacturer Part Number=N.A., Note="Chip Res 5%", Pad Count=2, Part Number=R0402-0R, Part number Norautron=N.A., PartId=100100109, Pin Count=2, Published=2009-05-08, Publisher="Nordic Semiconductor", Supplier 1=Farnell, Supplier 2=N.A., Supplier Part Number 2=N.A.
R3: library part CMP-07231-005593-1, "Thick Film Chip Resistors 1206 10kΩ 0.25W 5% 200ppm/°C", Case Code (Imperial)=1206, Case Code (Metric)=3216, Max Operating Temperature=155°C, Max Power Dissipation=250mW, Min Operating Temperature=-55°C, Package Quantity=1, Resistance=10kR, Temperature Coefficient=200ppm/°C, Tolerance=5%, Voltage Rating=200V, Case/Package=1206, Composition="Thick Film", Contact Plating=Tin, Depth=1.6mm, Features="Moisture Resistant", Height=0.6mm, Length=3.2mm, Military Standard=Not, Mount="Surface Mount", Number of Pins=2, Number of Terminations=2, Packaging="Tape and Reel", Power Rating=250mW, Radiation Hardening=No, REACH SVHC="No SVHC", Termination=SMD/SMT, Thickness=610um, Voltage Rating (DC)=200V, Width=1.6mm
R4 R5: library part CMP-07231-003298-1, "Thick Film Chip Resistors 1206 220Ω 0.25W 5% 200ppm/°C", Case Code (Imperial)=1206, Case Code (Metric)=3216, Max Operating Temperature=155°C, Max Power Dissipation=250mW, Min Operating Temperature=-55°C, Package Quantity=5000, Resistance=220R, Temperature Coefficient=200ppm/°C, Tolerance=5%, Voltage Rating=200V, Case/Package=1206, Composition="Thick Film", Contact Plating=Tin, Features="Moisture Resistant", Height=0.03inch, Length=0.126inch, Mount="Surface Mount", Number of Terminations=2, Packaging="Tape and Reel", Power Rating=250mW, Radiation Hardening=No, Termination=SMD/SMT, Thickness=610um, Width=0.063inch
R6 R7 R8: library part CMP-2001-01414-1, Manufacturer=Yageo, Part Number=RC0805JR-130RL
SW1: library part CMP-2100-03586-2, "SWITCH TACTILE SPST-NO 0.05A 12V", Contact Current Rating=50mA, Contact Resistance=100mR, Insulation Resistance=100MR, Max Operating Temperature=70°C, Max Voltage Rating (DC)=12V, Min Operating Temperature=-25°C, Operating Force=1.5N, Package Quantity=1, Ratings="Dust Proof", Actuator Length=0.4mm, Actuator Type=Standard, Contact Material=Silver, Current Rating=50mA, Depth=2.5mm, Electrical Life=200000Cycles, Height=1.2mm, Illumination Type=Non-Illuminated, Lead Free="Lead Free", Length=4mm, Max Current Rating=50mA, Mechanical Life=200000Cycles, Mount="Surface Mount", Orientation=Straight, Packaging="Tape and Reel", Switch Function=Off-Mom, Switch Travel=0.15mm, Termination=SMD/SMT, Throw Configuration=SPST, Voltage Rating (DC)=12V, Weight=0.000776oz, Width=3mm
U1: "Multi-protocol Bluetooth Low Energy, IEEE 802.15.4, ANT and 2.4GHz proprietary system-on-chip", Component Class=nRF_Devices, Footprint Doc=QFN-48, LatestRevisionDate=2016-11-22, Pad Count=48, Part Number=nRF52840-QFAA, Published=2016-03-31
U2: library part CMP-226158-000001-1, "Real Time Clock Serial 2byte Clock/Calendar/Alarm/Timer/Battery Backup 8-Pin CSMD T/R", Ambient Temperature Range High=+85°C, Ambient Temperature Range Low=-40°C, Frequency=32.768kHz, Manufacturer="Micro Crystal", Max Supply Voltage=5.5V, Min Supply Voltage=1.1V, Nominal Supply Current=0.04uA, Temperature="-40°C to +85°C", Automotive=No, Category=IC, ComponentLink2Description=Datasheet, ComponentLink2URL=https://www.microcrystal.com/fileadmin/Media/Products/RTC/Datasheet/RV-3028-C7.pdf, Device Class L1="Integrated Circuits (ICs)", Device Class L2="Clock and Timing", Device Class L3="Real Time Clocks", Height=0.8mm, Interface=I2C, Lead Free=Yes, Manufacturer Part Number="RV-3028-C7 32.768kHz 1ppm TA QC", Memory Size=2Bytes, Mouser Description="RV-3028-C7 32.768KHZ 1PPM Ta Qc", Number Of Outputs=1, Octopart=https://octopart.com/rv-3028-c7+32.768khz+1ppm+ta+qc-micro+crystal-98880451, Package="RV-3028-C7 32.768kHz 1ppm TA QC", RoHS=TRUE, Temperature Range High=+85°C, Temperature Range Low=-40°C
X1: library part CMP-27762-001068-1, "CRYSTAL 32.0000MHZ 8PF SMD", Case/Package=SMD/SMT, ESR (Equivalent Series Resistance)=80R, Frequency Stability=20ppm, Frequency Tolerance=10ppm, Load Capacitance=8pF, Max Operating Temperature=85°C, Min Operating Temperature=-40°C, Frequency=32MHz, Mount="Surface Mount", Packaging="Tape and Reel", RoHS Compliant=Yes
X2: library part CMP-27762-015421-1, "Crystal 32.768kHz ±20ppm (Tol) 9pF FUND 90kΩ 2-Pin Mini-CSMD T/R", Case/Package=CSMD, ESR (Equivalent Series Resistance)=90kR, Frequency=32.768kHz, Frequency Tolerance=20ppm, Load Capacitance=9pF, Max Operating Temperature=85°C, Min Operating Temperature=-40°C, Package Quantity=3000, Depth=1.2mm, Height=0.6mm, Lead Free="Lead Free", Length=2mm, Mount="Surface Mount", Number of Pins=2, Packaging="Tape and Reel", RoHS Compliant=Yes, Series=ABS06, Termination=SMD/SMT, Tolerance=20ppm, Width=1.2mm

## Via types
v1: diameter 0.5, hole 0.305, Top Layer to Bottom Layer, 88 vias
v2: diameter 0.66, hole 0.33, Top Layer to Bottom Layer, 16 vias
v3: diameter 0.61, hole 0.305, Top Layer to Bottom Layer, 4 vias
v4: diameter 0.5, hole 0.3, Top Layer to Bottom Layer, 3 vias

## Nets (pads, with @x,y where several pads share a name; then routed paths per layer and width w, separated by ;. In a path a pad name is that pad's centre, name@x,y a point inside that pad or via, vN(x,y) a via of type N, cw(c..) or ccw(c..) an arc to the next point about the centre after c; other vN are vias at no path point)
ANT: J1.3
DEC1: C5.2 U1.1 | length 1.7
  Top Layer w0.127: C5.2 94.43,58.148 94.43,57.91 95.099,57.242 U1.1
DEC3: C11.1 U1.34 | length 6.3
  Top Layer w0.127: U1.34 102.435,56.442 102.562,56.569 103.506,56.569 103.553,56.522 105.687,56.522 106.804,57.639 C11.1
DEC4_6: C14.2 C15.1 L4.1 U1.33 U1.46 | length 17.7
  Top Layer w0.127: U1.46 96.949,59.281 97.161,59.493 97.161,60.352 97.414,60.605 97.414,61.082 v1(97.409,61.087) 97.409,62.312 L4.1@97.501,62.404 ; 97.503,62.027 98.264,62.027 C14.2 99.117,61.785 C15.1@99.187,61.716 ; U1.33 101.388,56.056 103.1,56.056 v4(103.149,56.105)
  Bottom Layer w0.127: v1(97.409,61.087) 99.829,61.087 101.498,59.417 101.498,56.464 101.857,56.105 v4(103.149,56.105)
GND: C1.2 C2.1 C3.2 C4.2 C5.1 C6.1 C7.1 C8.1 C11.2 C12.1 C13.1 C14.1 C15.2 C16.2 C17.2 C18.1 C19.2 C20.2 C21.2 J1.2 J3.1 J4.1 J5.1 J6.1 R4.2 R5.2 R8.1 SW1.1 U1.32 U1.45 U1.49 U2.5 X1.2 | length 15.7
  Top Layer w0.127: C14.1@98.254,60.706 97.415,59.867 97.415,58.978 97.349,58.912 U1.45 97.349,56.042 v2(97.749,55.642) U1.49 v2(98.949,55.642) v2(100.149,55.642) U1.32 103.527,55.642 C3.2@103.962,56.077 ; C2.1@104.552,57.089 104.885,57.422 104.885,57.458 X1.2@105.041,57.613 ; J1.2@108.651,54.068 J1.2@108.676,54.068 ; J1.2@108.651,56.118 J1.2@108.676,56.118 ; J1.2@110.214,54.579 110.214,54.379 110.526,54.068 J1.2@110.551,54.068 ; J1.2@110.526,56.118 J1.2@110.551,56.118
  Top Layer w0.225: C14.1 98.51,60.92 99.182,60.92 C15.2@99.187,60.916 ; X1.2@104.07,59.189 104.445,59.564 C1.2@104.445,59.843 ; X1.2@105.041,57.613 105.147,57.72 X1.2@105.147,57.82
  other v1: 89.738,39.98 116.738,40.056 123.012,40.081 105.969,40.843 87.478,41.377 87.452,43.51 126.771,43.739 116.332,43.942 105.842,45.136 123.368,45.822 114.427,45.949 84.745,45.962 111.238,45.987 107.772,46.203 119.939,46.761 88.875,46.888 126.797,47.317 115.367,47.93 109.257,47.967 103.911,48.108 111.075,48.124 84.734,48.539 96.672,48.717 122.758,48.92 112.217,49.454 115.316,49.479 119.837,49.479 94.742,49.657 104.673,50.267 81.864,50.521 85.471,50.673 126.822,50.894 107.073,51.523 92.354,52.299 119.913,52.324 88.011,52.375 112.649,52.451 106.045,52.756 81.89,53.035 126.644,54.472 81.813,55.423 107.696,56.261 88.849,57.15 110.668,57.302 123.774,57.912 108.306,58.014 126.771,58.05 120.396,58.064 81.839,58.166 113.005,58.471 92.05,59.411 106.807,59.512 110.134,59.538 115.587,59.842 104.597,61.366 126.848,61.628 81.229,61.874 117.653,61.9 114.452,61.951 120.32,61.951 94.844,62.357 105.334,63.094 111.43,63.119 99.672,63.269 81.382,64.237 93.142,64.338 105.867,64.922 88.951,65.075 126.848,65.205 90.856,66.7 81.534,66.751 108.179,66.827 86.766,67.818 126.848,68.783 95.631,70.358 100.584,70.358 108.331,70.485 112.878,70.536 117.272,70.536 123.52,70.536 82.398,70.688 88.951,70.688
  other v2: 96.549,53.242 97.749,53.242 98.949,53.242 100.149,53.242 96.549,54.442 97.749,54.442 98.949,54.442 100.149,54.442 96.549,55.642 96.549,56.842 97.749,56.842 98.949,56.842 100.149,56.842
  other v4: 85.115,59.944
NetC3_1: C3.1 L1.1 U1.31 | length 3.4
  Top Layer w0.127: C3.1@103.927,55.242 103.962,55.277 C3.1@104.001,55.238
  Top Layer w0.3: U1.31 C3.1@103.927,55.242 ; C3.1@104.001,55.238 L1.1
NetC4_1: C4.1 L1.2 L2.1 | length 1.5
  Top Layer w0.127: L1.2@105.282,55.242 L1.2 105.279,54.786 C4.1@105.334,54.731 ; L2.1@106.29,55.242 L2.1
  Top Layer w0.3: L1.2@105.282,55.242 L2.1@106.29,55.242
NetL3_1: L3.1 L4.2 | length 0.8
  Top Layer w0.127: L3.1@96.571,61.563 96.571,62.399 L4.2@96.576,62.404
NetL3_2: L3.2 U1.47 | length 2.2
  Top Layer w0.127: U1.47 96.549,60.191 L3.2@96.571,60.213
NetLED1_1: LED1.1 R5.1 | length 2
  Top Layer w0.3: LED1.1@84.811,65.306 85.042,65.075 R5.1@86.743,65.075
NetLED1_2: LED1.2 R7.2 | length 4.9
  Top Layer w0.3: LED1.2@84.811,68.806 89.647,68.806 R7.2
NetPWR_1: PWR.1 R4.1 | length 2.2
  Top Layer w0.3: R4.1 89.177,43.508 PWR.1
NetR6_1: R6.1 R8.2 U2.8 | length 4.4
  Top Layer w0.2: R6.1 111.823,67.31 R8.2 111.839,65.345 U2.8
NFC1: C18.2 J2.3 R1.1 | length 5.4
  Top Layer w0.127: R1.1 117.41,47.125 118.56,47.125 118.634,47.051 C18.2 119.009,45.298 119.71,44.597 119.71,43.667 J2.3@119.685,43.693
NFC2: C19.1 J2.4 R2.1 | length 4.8
  Top Layer w0.127: J2.4@120.21,43.667 120.21,44.774 120.285,44.848 120.67,44.848 C19.1 121.457,45.26 122.25,46.053 122.25,46.804 122.462,47.015 R2.1
P0.00/XL1: C16.1 U1.2 X2.2 | length 4.5
  Top Layer w0.127: X2.2@91.821,58.326 93.472,58.326 93.472,58.276 93.52,58.276 93.694,58.103 93.694,58.035 93.77,57.959 93.77,57.36 94.288,56.842 U1.2
P0.01/XL2: C17.1 U1.3 X2.1 | length 3.6
  Top Layer w0.127: X2.1@91.81,56.555 93.28,56.555 93.393,56.442 U1.3
P0.02/AIN0: J7.2 U1.40 | length 11.1
  Top Layer w0.127: U1.40 99.349,58.943 99.681,59.276 99.864,59.276 104.394,63.806 J7.2
P0.03/AIN1: J7.9 U1.39 | length 23.7
  Top Layer w0.127: J7.9 95.462,68.241 99.253,68.241 ccw(c99.314,69.469) 99.314,68.24 104.463,68.24 105.369,67.333 105.369,65.878 104.648,65.156 104.648,63.701 99.969,59.022 99.823,59.022 99.749,58.947 U1.39
P0.04/AIN2: J5.10 U1.4 | length 24.5
  Top Layer w0.127: J5.10@79.797,69.352 83.797,65.352 83.797,59.478 87.249,56.026 95.031,56.026 95.033,56.028 95.31,56.028 U1.4
P0.05/AIN3: J5.9 U1.5 | length 22.4
  Top Layer w0.127: J5.9@79.86,66.876 83.543,63.193 83.543,59.373 87.274,55.642 U1.5
P0.07: J5.8 U1.6 U2.2 | length 63.4
  Top Layer w0.127: J5.8 80.218,64.231 83.289,61.161 83.289,59.268 87.315,55.242 U1.6 ; v1(115.087,62.789) 115.087,64.087 U2.2
  Bottom Layer w0.127: J5.8 79.868,64.119 80.746,64.119 81.095,63.771 99.053,63.771 99.738,64.456 106.467,64.456 109.735,67.725 114.315,67.725 115.087,66.953 v1(115.087,62.789)
P0.08: J5.7 U1.7 | length 18.9
  Top Layer w0.127: J5.7 79.981,61.466 80.672,61.466 87.297,54.842 U1.7 ; J5.7@79.758,62.209 79.989,62.209 J5.7@79.989,61.978
P0.09/NFC1: R1.2 U1.29 | length 18.7
  Top Layer w0.127: U1.29 102.803,54.442 108.655,48.59 116.054,48.59 116.156,48.489 116.156,47.354 116.367,47.142 R1.2
P0.10/NFC2: R2.2 U1.30 | length 25.6
  Top Layer w0.127: U1.30 103.095,54.842 109.093,48.844 121.996,48.844 123.434,47.407 123.434,47.068 R2.2
P0.11: J5.4 U1.10 | length 15.7
  Top Layer w0.127: J5.4 86.899,54.071 87.328,53.642 U1.10
P0.12: J5.3 U1.11 | length 16.2
  Top Layer w0.127: J5.3@79.756,51.664 85.827,51.664 87.405,53.242 U1.11
P0.13: U1.13
P0.14: U1.14
P0.17: U1.15
P0.18/RESET: R3.1 SW1.2 U1.16 | length 12.9
  Top Layer w0.127: R3.1 88.032,49.027 88.368,48.69 SW1.2 ; SW1.2@88.875,48.639 95.172,48.639 97.358,50.825 97.358,52.007 U1.16
P0.19: J6.2 U1.18 | length 11.2
  Top Layer w0.127: J6.2@92.265,43.815 J6.2 92.854,44.086 93.463,44.086 98.149,48.771 U1.18
P0.20: J6.4 U1.19 | length 9.6
  Top Layer w0.127: J6.4 95.123,44.882 98.549,48.308 98.549,50.138 ; 98.549,50.138 U1.19
P0.21: J6.6 U1.20 | length 8.7
  Top Layer w0.127: J6.6 97.663,46.939 98.949,48.225 U1.20
P0.22: J6.8 U1.21 U2.3 | length 40.3
  Top Layer w0.127: U1.21 99.349,44.669 J6.8 ; U2.3 116.053,64.137 v1(116.053,62.789)
  Bottom Layer w0.127: J6.8 100.215,43.827 101.376,43.827 102.339,44.79 103.215,44.79 103.937,44.069 107.679,44.069 116.053,52.443 v1(116.053,62.789)
P0.23: J6.10 U1.22 U2.4 | length 39
  Top Layer w0.127: U1.22 99.749,49.298 102.743,46.304 J6.10 ; v1(116.942,62.789) 116.942,64.141 U2.4
  Bottom Layer w0.127: J6.10 108.407,43.815 116.942,52.349 v1(116.942,62.789)
P0.24: J6.9 U1.23 | length 12.6
  Top Layer w0.127: U1.23 100.149,49.369 103.718,45.8 103.718,42.25 J6.9
P0.28/AIN4: J7.4 U1.41 | length 10.2
  Top Layer w0.127: U1.41 98.949,58.94 99.539,59.53 99.759,59.53 101.854,61.625 J7.4
P0.29/AIN5: J7.6 U1.42 | length 10.6
  Top Layer w0.127: U1.42 98.549,59.172 99.161,59.784 99.653,59.784 100.632,60.763 100.632,65.611 J7.6
P0.30/AIN6: J7.8 U1.43 | length 11.6
  Top Layer w0.127: J7.8 100.378,63.325 100.378,60.868 99.548,60.038 98.921,60.038 98.149,59.265 U1.43
P0.31/AIN7: J7.10 U1.44 | length 13.4
  Top Layer w0.127: J7.10 94.277,66.886 95.209,66.886 100.124,61.971 100.124,60.973 99.443,60.292 98.506,60.292 97.749,59.534 U1.44
P1.00: J6.7 U1.24 | length 16.8
  Top Layer w0.127: J6.7 101.178,40.3 103.147,40.3 103.972,41.125 103.972,45.905 100.549,49.329 U1.24
P1.08: J5.6 U1.8 | length 17.8
  Top Layer w0.127: J5.6@79.429,59.36 J5.6@79.637,59.151 ; J5.6 82.606,59.151 87.316,54.442 U1.8
P1.09: J5.5 U1.9 | length 16.6
  Top Layer w0.127: J5.5 84.74,56.611 87.309,54.042 U1.9
P1.15: J7.7 R7.1 U1.38 | length 28.3
  Top Layer w0.127: R7.1 91.326,69.064 91.662,69.401 91.842,69.401 93.265,70.824 95.824,70.824 96.498,70.15 96.498,69.745 J7.7 98.939,68.568 ccw(c99.314,69.469) 99.314,68.494 104.568,68.494 105.623,67.438 105.623,65.772 104.902,65.051 104.902,63.596 104.775,63.469 100.149,58.842 U1.38
RF: J1.1 L2.2 | length 1.6
  Top Layer w0.3: L2.2 J1.1
SWDCLK: J3.2 U1.27 | length 17.6
  Top Layer w0.127: U1.27 101.377,53.645 102.921,53.645 112.319,44.247 J3.2@112.319,41.516
SWDIO: J3.3 U1.26 | length 16.2
  Top Layer w0.127: U1.26 102.714,53.242 110.338,45.618 J3.3@110.338,41.516
VDD_nrf: C6.2 C7.2 C8.2 C12.2 C13.2 C20.1 C21.1 J3.4 J4.2 J5.2 J6.3 PWR.2 R3.2 R6.2 U1.12 U1.17 U1.25 U1.37 U1.48 U2.7 | length 129.6
  Top Layer w0.127: v3(93.599,60.325) 93.73,60.325 93.866,60.189 95.064,60.189 C13.2@95.25,60.002 ; C7.2@97.688,49.637 97.687,49.639 97.687,50.367 v4(97.685,50.368) 97.733,50.368 v4@97.749,50.384 ; U1.17 v4@97.749,50.384 ; v4@97.765,50.368 v4@97.749,50.384
  Top Layer w0.2: R3.2@90.854,50.394 92.202,50.394 93.296,51.488 93.296,51.969 93.902,52.575 94.088,52.575 C6.2@94.239,52.726 ; C6.2@94.37,52.842 U1.12 ; R6.2 110.198,67.56 110.498,67.86 110.977,67.86 111.671,68.555 112.827,68.555 v1(114.122,67.259) 115.145,66.236 U2.7
  Top Layer w0.3: J5.2 83.014,48.991 83.339,48.666 C21.1 83.245,48.535 C20.1 83.007,45.724 J4.2 84.541,42.961 85.13,42.961 PWR.2 ; v1@94.526,42.215 95.239,41.503 J6.3@95.239,41.032 ; C13.2@95.25,59.934 95.4,59.934 95.418,59.915 95.418,59.523 96.149,58.793 U1.48 ; U1.37@100.599,58.242 100.804,58.447 100.804,58.665 v3(100.863,58.725) 100.863,58.744 101.696,59.576 C12.2@101.696,59.639 ; U1.25 102.313,52.842 102.489,52.666 102.489,52.091 102.72,51.86 101.819,51.86 v3(101.78,51.9)
  Bottom Layer w0.2: v3(93.599,60.325) 96.754,63.48 99.173,63.48 99.828,64.135 106.556,64.135 109.68,67.259 v1(114.122,67.259)
  Bottom Layer w0.3: J5.2@79.731,49.098 90.907,49.098 v3(93.218,51.41) ; v3(100.863,58.725) 100.863,59.571 100.439,59.995 93.929,59.995 v3(93.599,60.325) 93.599,60.241 93.218,59.86 v3(93.218,51.41) ; v3(101.78,51.9) 100.248,50.368 v4(97.685,50.368) 96.644,51.41 v3(93.218,51.41) ; J3.4 107.619,42.418 v1(94.488,42.418) 93.645,43.261 93.645,44.255 93.218,44.682 v3(93.218,51.41)
XC1: C2.2 U1.35 X1.1 | length 3.7
  Top Layer w0.127: U1.35 102.75,56.842 103.058,57.15 104.007,57.15 104.007,58.026 X1.1@104.02,58.039
XC2: C1.1 U1.36 X1.3 | length 6.9
  Top Layer w0.127: U1.36 102.606,57.242 102.794,57.429 102.794,59.083 103.181,59.47 103.181,59.474 103.95,60.242 104.699,60.242 105.015,59.926 105.015,59.594 X1.3@105.42,59.189
pads on no net: J2.1 J2.2 J2.5 J2.6 J2.7 J6.5 J7.1 J7.3 J7.5 U1.28 U2.1 U2.6
copper on no net: | length 163.6
  Top Layer w0.254: 77.906,39.221 127.528,39.221 127.528,71.42 77.906,71.42 77.906,39.221

## Polygon pours and split planes (outlines as drawn)
GND on Top Layer "GND_L01_P002" (solid, remove dead copper, pour order 2): 77.906,71.42 127.512,71.42 127.528,39.221 77.906,39.289
GND on Bottom Layer "GND_L02_P001" (solid, pour order 1): 78.029,71.298 127.508,71.298 127.508,39.319 78.029,39.319

## Other copper
Top Layer:
  pour cut-out: 94.65,57.242 94.648,57.244 92.906,57.244 92.906,56.261 94.65,56.261
  pour cut-out: 94.539,59.182 102.421,59.182 102.421,51.308 94.539,51.308

## Silkscreen, mask and mechanical layers (free items; w line width, h text height)
Top Overlay:
  text "GND" at 114.738,43.148 h0.3 r90
  text "SWDIO" at 110.471,43.098 h0.3 r90
  text "VDD" at 108.667,43.072 h0.3 r90
  text "SWDCLK" at 112.528,43.021 h0.3 r90
  text "VDD (3.3 max)" at 88.068,39.91 h0.5 r180
Bottom Overlay:
  lines w0.254: 83.464,52.527 87.02,52.527 ; 83.464,53.975 86.995,53.975 ; 83.464,55.423 87.046,55.423 ; 83.464,56.871 87.046,56.871 ; 83.464,58.318 87.02,58.293 ; 83.464,59.766 87.046,59.741 ; 83.464,61.214 87.046,61.214 ; 83.464,62.662 87.046,62.662 ; 83.464,64.11 87.046,64.11 ; 83.464,65.557 87.071,65.583 ; 86.944,51.079 85.669,51.079 87.071,51.079 87.071,65.583 ; 89.179,49.606 94.293,49.606 ; 91.999,52.019 89.179,52.019 ; 92.451,47.244 92.451,51.857 ; 92.71,52.019 101.287,52.019 ; 95.191,49.606 105.512,49.606 ; 95.707,47.244 95.722,52.019 ; 98.994,47.295 98.994,52.019 ; 102.265,47.269 102.265,51.754 ; 102.272,52.019 105.512,52.019 105.512,47.193 ; 105.537,52.019 105.512,47.193 ; 83.464,51.079 85.273,51.079 83.464,51.079 ; 83.464,51.079 83.464,65.583 87.071,65.583 ; 89.179,47.193 89.179,52.019 ; 89.179,47.193 89.179,52.019 ; 89.179,47.193 105.512,47.193
  text "P0.04" at 86.112,64.738 h0.5
  text "J5 - Pinout" at 82.756,63.477 h1 r90
  text "P0.05" at 86.29,63.164 h0.5
  text "P0.07" at 86.214,61.817 h0.5
  text "P0.08" at 86.214,60.268 h0.5
  text "P1.08" at 86.188,58.82 h0.5
  text "P1.09" at 86.188,57.347 h0.5
  text "P1.11" at 86.138,55.899 h0.5
  text "P1.12" at 86.214,54.401 h0.5
  text "VDD" at 85.909,53.004 h0.5
  text "GND" at 85.909,51.683 h0.5
  text "P0.19" at 91.878,50.616 h0.5
  text "P0.20" at 95.18,50.616 h0.5
  text "P0.21" at 98.355,50.616 h0.5
  text "P0.22" at 101.657,50.616 h0.5
  text "P0.23" at 105.086,50.616 h0.5
  text "N.C" at 97.974,48.203 h0.5
  text "P1.00" at 101.657,48.203 h0.5
  text "P0.24" at 105.086,48.203 h0.5
  text "GND" at 91.243,48.076 h0.5
  text "VDD" at 94.799,48.076 h0.5
  text "J6 - Pinout" at 102.618,45.692 h1
Drill Drawing:
  circle w0.254: c39.624,81.258 r0.359
  lines w0.254: 39.265,82.696 39.444,82.696 39.624,82.516 39.804,82.696 39.983,82.696 39.804,82.875 39.983,83.055 39.804,83.055 39.624,83.235 39.444,83.055 39.265,83.055 39.444,82.875 39.265,82.696 ; 39.265,84.313 39.444,84.313 39.444,84.133 39.804,84.133 39.804,84.313 39.983,84.313 39.983,84.672 39.804,84.672 39.804,84.852 39.444,84.852 39.444,84.672 39.265,84.672 39.265,84.313 ; 39.265,86.109 39.624,85.75 39.983,86.109 39.624,86.469 39.265,86.109 ; 39.265,87.367 39.624,87.547 39.983,87.367 39.804,87.726 39.983,88.086 39.624,87.906 39.265,88.086 39.444,87.726 39.265,87.367 ; 39.265,89.703 39.983,89.703 39.624,88.984 39.265,89.703 ; 39.265,90.601 39.265,90.781 39.444,90.96 39.265,91.14 39.265,91.32 39.444,91.32 39.624,91.14 39.804,91.32 39.983,91.32 39.983,91.14 39.804,90.96 39.983,90.781 39.983,90.601 39.804,90.601 39.624,90.781 39.444,90.601 39.265,90.601 ; 39.265,92.218 39.983,92.218 39.983,92.937 39.265,92.937 39.265,92.218
  lines w0.381: 38.575,80.414 163.911,80.414 ; 38.575,93.35 163.911,93.35 ; 44.981,78.797 44.981,94.967 ; 51.632,78.797 51.632,94.967 ; 63.995,78.797 63.995,94.967 ; 69.916,78.797 69.916,94.967 ; 78.294,78.797 78.294,94.967 ; 94.752,78.797 94.752,94.967 ; 101.579,78.797 101.579,94.967 ; 110.086,78.797 110.086,94.967 ; 124.065,78.797 124.065,94.967 ; 133.737,78.797 133.737,94.967 ; 148.581,78.797 148.581,94.967 ; 38.575,78.797 163.911,78.797 163.911,94.967 38.575,94.967 38.575,78.797
  text "Symbol" at 39.545,93.835 h0.78
  text "Count" at 45.466,93.835 h0.78
  text "Hole Size" at 52.117,93.835 h0.78
  text "Plated" at 64.48,93.835 h0.78
  text "Hole Type" at 70.401,93.835 h0.78
  text "Drill Layer Pair" at 78.779,93.835 h0.78
  text "Via/Pad" at 95.237,93.835 h0.78
  text "Pad Shape" at 102.064,93.835 h0.78
  text "Template" at 110.571,93.835 h0.78
  text "Description" at 124.551,93.835 h0.78
  text "Hole Tolerance (+)" at 134.222,93.835 h0.78
  text "Hole Tolerance (-)" at 149.066,93.835 h0.78
  text "1" at 45.466,92.218 h0.65
  text "0,305mm (12,01mil)" at 52.117,92.218 h0.65
  text "PTH" at 64.48,92.218 h0.65
  text "Round" at 70.401,92.218 h0.65
  text "Top Layer - Bottom Layer" at 78.779,92.218 h0.65
  text "Via" at 95.237,92.218 h0.65
  text "Rounded" at 102.064,92.218 h0.65
  text "v50h30_2670034071" at 110.571,92.218 h0.65
  text "1" at 45.466,90.601 h0.65
  text "0,305mm (12,01mil)" at 52.117,90.601 h0.65
  text "PTH" at 64.48,90.601 h0.65
  text "Round" at 70.401,90.601 h0.65
  text "Top Layer - Bottom Layer" at 78.779,90.601 h0.65
  text "Via" at 95.237,90.601 h0.65
  text "Rounded" at 102.064,90.601 h0.65
  text "v50h30_2670034071" at 110.571,90.601 h0.65
  text "3" at 45.466,88.984 h0.65
  text "0,300mm (11,81mil)" at 52.117,88.984 h0.65
  text "PTH" at 64.48,88.984 h0.65
  text "Round" at 70.401,88.984 h0.65
  text "Top Layer - Bottom Layer" at 78.779,88.984 h0.65
  text "Via" at 95.237,88.984 h0.65
  text "Rounded" at 102.064,88.984 h0.65
  text "(Mixed)" at 110.571,88.984 h0.65
  text "4" at 45.466,87.367 h0.65
  text "0,890mm (35,04mil)" at 52.117,87.367 h0.65
  text "PTH" at 64.48,87.367 h0.65
  text "Round" at 70.401,87.367 h0.65
  text "Top Layer - Bottom Layer" at 78.779,87.367 h0.65
  text "Pad" at 95.237,87.367 h0.65
  text "(Mixed)" at 102.064,87.367 h0.65
  text "(Mixed)" at 110.571,87.367 h0.65
  text "10" at 45.466,85.75 h0.65
  text "1,100mm (43,31mil)" at 52.117,85.75 h0.65
  text "PTH" at 64.48,85.75 h0.65
  text "Round" at 70.401,85.75 h0.65
  text "Top Layer - Bottom Layer" at 78.779,85.75 h0.65
  text "Pad" at 95.237,85.75 h0.65
  text "(Mixed)" at 102.064,85.75 h0.65
  text "(Mixed)" at 110.571,85.75 h0.65
  text "16" at 45.466,84.133 h0.65
  text "0,330mm (12,99mil)" at 52.117,84.133 h0.65
  text "PTH" at 64.48,84.133 h0.65
  text "Round" at 70.401,84.133 h0.65
  text "Top Layer - Bottom Layer" at 78.779,84.133 h0.65
  text "Via" at 95.237,84.133 h0.65
  text "Rounded" at 102.064,84.133 h0.65
  text "v66h33m74_2670034071" at 110.571,84.133 h0.65
  text "22" at 45.466,82.516 h0.65
  text "1,020mm (40,16mil)" at 52.117,82.516 h0.65
  text "PTH" at 64.48,82.516 h0.65
  text "Round" at 70.401,82.516 h0.65
  text "Top Layer - Bottom Layer" at 78.779,82.516 h0.65
  text "Pad" at 95.237,82.516 h0.65
  text "(Mixed)" at 102.064,82.516 h0.65
  text "(Mixed)" at 110.571,82.516 h0.65
  text "90" at 45.466,80.899 h0.65
  text "0,305mm (12,01mil)" at 52.117,80.899 h0.65
  text "PTH" at 64.48,80.899 h0.65
  text "Round" at 70.401,80.899 h0.65